# EAGLE board stepper cape (EAGLE 6.2)
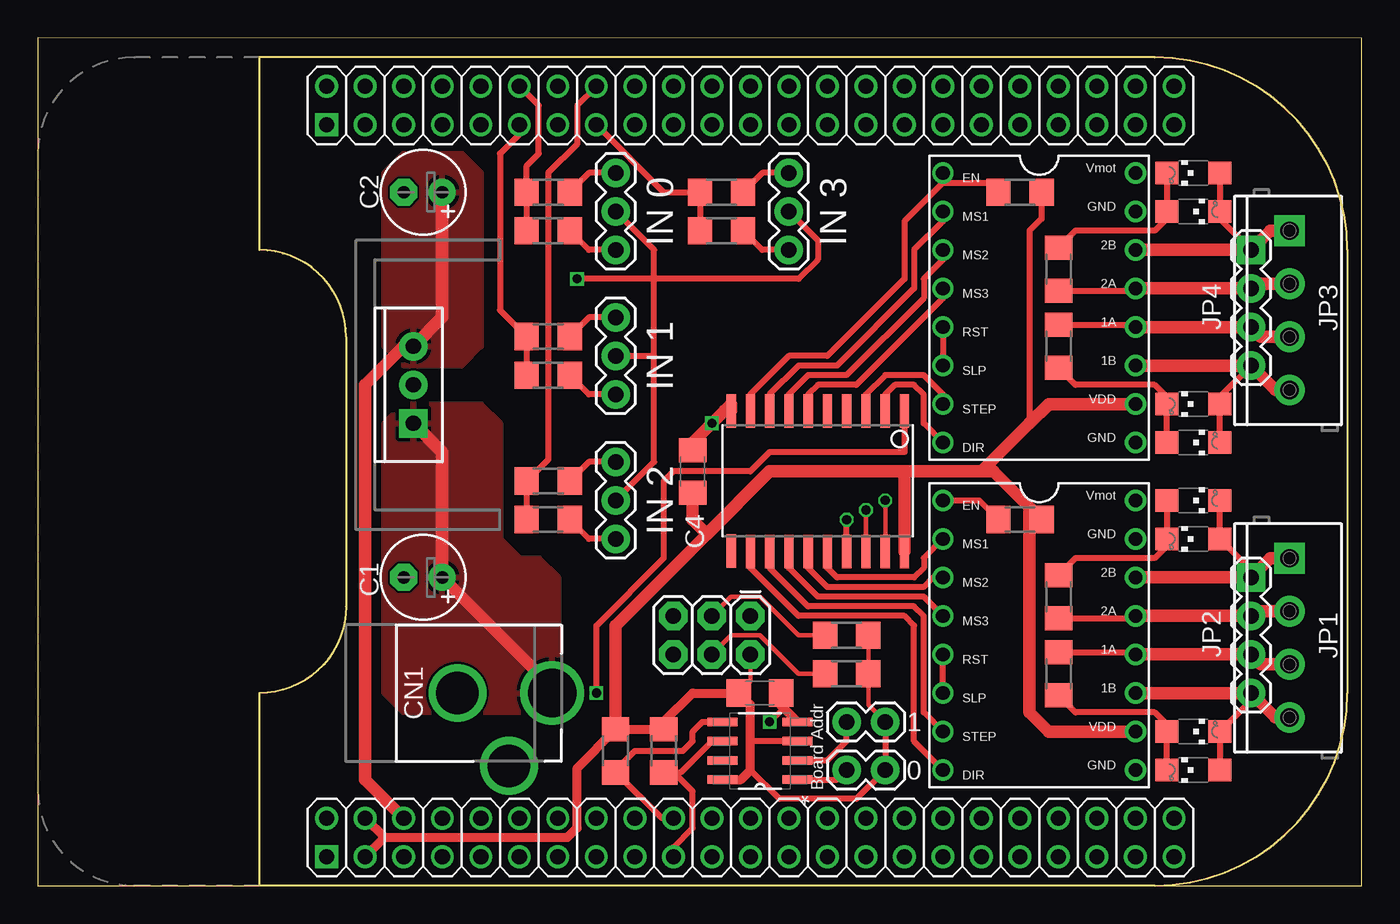
[diagram p0: board, top side]
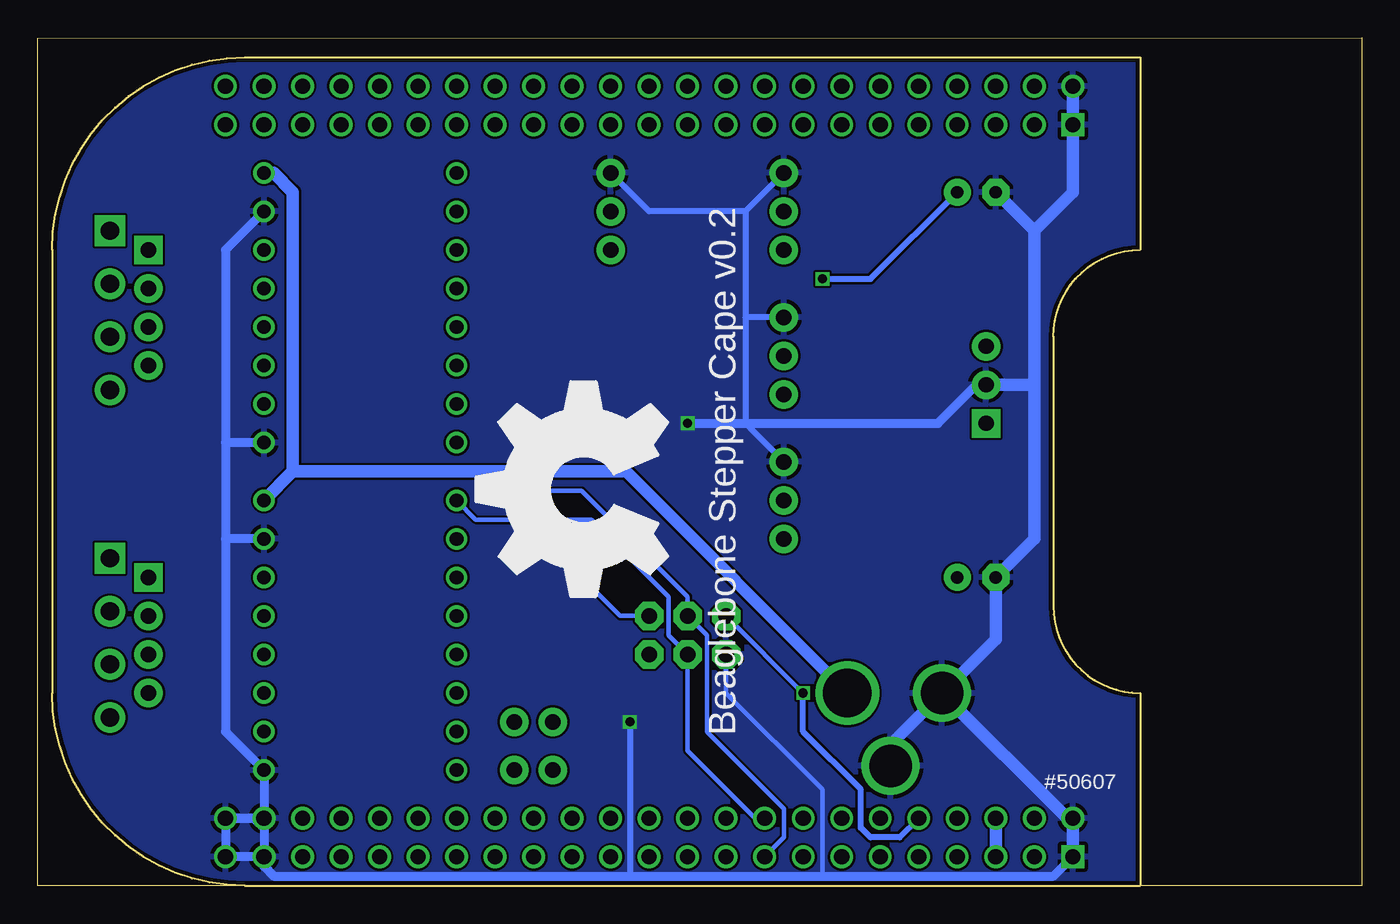
[diagram p1: board, bottom side, seen from below]

Size 87.3 x 55.89 mm. Coordinates in mm from the lower left corner, seen from the top.
Outline: 0,0 87.3,0 87.3,55.87 0,55.89 0,0
Copper layers (1*16): Top 0.035mm / dielectric 1.5mm / Bottom 0.035mm
Design rules: minimum track width 6mil, minimum drill 12mil, track to track 6mil, track to pad 6mil, pad to pad 6mil, via to via 6mil, smd to smd 0mil, copper to edge 10mil, drill to drill 10mil, minimum pad ring 10mil, minimum via ring 6mil, stop-mask expansion 2mil, vias tented up to drill 100mil, thermal gap 10mil

## Footprints (pad centres in the part's own frame; a part is rotated, then mirrored left to right if it is on the bottom)
E2,5-6 = drill 0.813 pad 1.778: + -1.27,0 | drill 0.813 pad 1.778 octagon: - 1.27,0
C1206 = smd 1.6 x 1.8: 1 -1.4,0; 2 1.4,0
DCJACK_2MM_PTH = drill 2.8: GND 0,7.35; GNDBREAK 4.8,10.75 | drill 3.2: PWR 0,13.6
2X3 = drill 1.016 pad 1.88 octagon: 1 0,0; 2 0,2.54; 3 2.54,0; 4 2.54,2.54; 5 5.08,0; 6 5.08,2.54
SCREWTERMINAL-3.5MM-4 = drill 1.2 pad 2.032 square: 1 0,0 | drill 1.2 pad 2.032: 2 3.5,0; 3 7,0; 4 10.5,0
1X04 = drill 1.016 pad 1.88 square: 1 0,0 | drill 1.016 pad 1.88: 2 2.54,0; 3 5.08,0; 4 7.62,0
1X03 = drill 1.016 pad 1.88: 1 0,0; 2 2.54,0; 3 5.08,0
1X02 = drill 1.016 pad 1.88: 1 0,0; 2 2.54,0
CHIPLED_1206 = smd 1.5 x 1.5: A 0,-1.75; C 0,1.75
R1206 = smd 1.6 x 1.803: 1 -1.422,0; 2 1.422,0
SOIC127P600X175-8N = smd 1.981 x 0.559: 1 -2.464,1.905; 2 -2.464,0.635; 3 -2.464,-0.635; 4 -2.464,-1.905; 5 2.464,-1.905; 6 2.464,-0.635; 7 2.464,0.635; 8 2.464,1.905
TO220-IGO = drill 1 pad 1.88: GND 0,0; OUT 2.54,0 | drill 1 pad 1.88 square: IN -2.54,0
BEAGLEBONE_SHIELD = drill 1 square: 1 4.445,19.05; 47 52.705,19.05 | drill 1: 2 1.905,19.05; 3 4.445,21.59; 4 1.905,21.59; 5 4.445,24.13; 6 1.905,24.13; 7 4.445,26.67; 8 1.905,26.67; 9 4.445,29.21; 10 1.905,29.21; 11 4.445,31.75; 12 1.905,31.75; 13 4.445,34.29; 14 1.905,34.29; 15 4.445,36.83; 16 1.905,36.83; 17 4.445,39.37; 18 1.905,39.37; 19 4.445,41.91; 20 1.905,41.91; 21 4.445,44.45; 22 1.905,44.45; 23 4.445,46.99; 24 1.905,46.99; 25 4.445,49.53; 26 1.905,49.53; 27 4.445,52.07; 28 1.905,52.07; 29 4.445,54.61; 30 1.905,54.61; 31 4.445,57.15; 32 1.905,57.15; 33 4.445,59.69; 34 1.905,59.69; 35 4.445,62.23; 36 1.905,62.23; 37 4.445,64.77; 38 1.905,64.77; 39 4.445,67.31; 40 1.905,67.31; 41 4.445,69.85; 42 1.905,69.85; 43 4.445,72.39; 44 1.905,72.39; 45 4.445,74.93; 46 1.905,74.93; 48 50.165,19.05; 49 52.705,21.59; 50 50.165,21.59; 51 52.705,24.13; 52 50.165,24.13; 53 52.705,26.67; 54 50.165,26.67; 55 52.705,29.21; 56 50.165,29.21; 57 52.705,31.75; 58 50.165,31.75; 59 52.705,34.29; 60 50.165,34.29; 61 52.705,36.83; 62 50.165,36.83; 63 52.705,39.37; 64 50.165,39.37; 65 52.705,41.91; 66 50.165,41.91; 67 52.705,44.45; 68 50.165,44.45; 69 52.705,46.99; 70 50.165,46.99; 71 52.705,49.53; 72 50.165,49.53; 73 52.705,52.07; 74 50.165,52.07; 75 52.705,54.61; 76 50.165,54.61; 77 52.705,57.15; 78 50.165,57.15; 79 52.705,59.69; 80 50.165,59.69; 81 52.705,62.23; 82 50.165,62.23; 83 52.705,64.77; 84 50.165,64.77; 85 52.705,67.31; 86 50.165,67.31; 87 52.705,69.85; 88 50.165,69.85; 89 52.705,72.39; 90 50.165,72.39; 91 52.705,74.93; 92 50.165,74.93
SO20L$ = smd 0.61 x 2.21: 1 -5.715,-4.636; 2 -4.445,-4.636; 3 -3.175,-4.636; 4 -1.905,-4.636; 5 -0.635,-4.636; 6 0.635,-4.636; 7 1.905,-4.636; 8 3.175,-4.636; 9 4.445,-4.636; 10 5.715,-4.636; 11 5.715,4.61; 12 4.445,4.636; 13 3.175,4.636; 14 1.905,4.636; 15 0.635,4.636; 16 -0.635,4.636; 17 -1.905,4.636; 18 -3.175,4.636; 19 -4.445,4.636; 20 -5.715,4.636
A4988BREAKOUT = drill 0.9: 1A 8.89,1.27; 1B 11.43,1.27; 2A 6.35,1.27; 2B 3.81,1.27; DIR 16.51,-11.43; EN -1.27,-11.43; GND 16.51,1.27; GND@0 1.27,1.27; MS1 1.27,-11.43; MS2 3.81,-11.43; MS3 6.35,-11.43; RST 8.89,-11.43; SLP 11.43,-11.43; STEP 13.97,-11.43; VDD 13.97,1.27; VMOT -1.27,1.27

## Placement (x,y rotation side)
C1  100u  [E2,5-6]  25.4,20.32 180 top
C2  100u  [E2,5-6]  25.4,45.72 180 top
C3  0.1u  [C1206]  47.62,12.7 0 top
C4  0.1u  [C1206]  43.18,27.3 90 top
CN1  [DCJACK_2MM_PTH]  20.32,12.7 270 top
J1  ISP  [2X3]  46.99,17.78 180 top
JP1  [SCREWTERMINAL-3.5MM-4]  82.55,21.59 270 top
JP2  [1X04]  80.01,20.32 270 top
JP3  [SCREWTERMINAL-3.5MM-4]  82.55,43.18 270 top
JP4  [1X04]  80.01,41.91 270 top
JP5  [1X03]  38.1,37.47 270 top
JP6  [1X03]  38.1,46.99 270 top
JP7  [1X03]  38.1,27.94 270 top
JP8  [1X03]  49.53,46.99 270 top
JP9  [1X02]  53.34,7.62 0 top
JP10  [1X02]  53.34,10.79 0 top
LED1  [CHIPLED_1206]  76.2,25.4 270 top
LED2  [CHIPLED_1206]  76.2,22.86 90 top
LED3  [CHIPLED_1206]  76.2,7.62 90 top
LED4  [CHIPLED_1206]  76.2,10.16 270 top
LED5  [CHIPLED_1206]  76.2,44.45 270 top
LED6  [CHIPLED_1206]  76.2,46.99 90 top
LED7  [CHIPLED_1206]  76.2,31.75 90 top
LED8  [CHIPLED_1206]  76.2,29.21 270 top
R1  5k6  [R1206]  53.34,13.97 0 top
R2  5k6  [R1206]  41.27,8.89 90 top
R3  5k6  [R1206]  38.1,8.89 90 top
R4  1k  [R1206]  67.31,40.64 270 top
R5  1k  [R1206]  67.31,35.56 90 top
R6  4k7  [R1206]  64.77,24.13 0 top
R7  1k  [R1206]  67.31,19.05 270 top
R8  1k  [R1206]  67.31,13.97 90 top
R9  4k7  [R1206]  64.77,45.72 0 top
R10  10k  [R1206]  33.66,33.66 0 top
R11  20k  [R1206]  33.66,36.2 180 top
R12  10k  [R1206]  33.66,43.18 0 top
R13  20k  [R1206]  33.66,45.72 180 top
R14  10k  [R1206]  33.66,24.13 0 top
R15  20k  [R1206]  33.66,26.67 180 top
R16  10k  [R1206]  45.09,43.18 0 top
R17  20k  [R1206]  45.09,45.72 180 top
R18  5k6  [R1206]  53.34,16.51 0 top
U1  CAT24C  [SOIC127P600X175-8N]  47.62,8.89 180 top
U2  LM7805  [TO220-IGO]  24.77,33.02 90 top
U$1  BEAGLEBONE_OUTLINE  [BEAGLEBONE_SHIELD]  0,54.61 270 top
U$2  ATTINY2313  [SO20L$]  51.44,26.67 180 top
U$3  [OSHW_FILLX500_NOTEXT]  45.72,19.05 90 bottom
X  A4988BREAKOUT  [A4988BREAKOUT]  71.12,24.13 270 top
X1  A4988BREAKOUT  [A4988BREAKOUT]  71.12,45.72 270 top

## Library data of the parts
C1-C4 CN1 LED1-LED8 R1-R18 U$1 = adafruit
J1 JP1-JP10 = SparkFun-Connectors
U1 = CAT24C256W; MPN: CAT24C256WI-GT3; OC_FARNELL: 1718127; OC_NEWARK: 08R5412; PACKAGE: SOIC-8; SUPPLIER: CATALYST SEMICONDUCTOR
U2 = SparkFun-PowerIC
U$2 = avr-7
U$3 = ohw-logo
X X1 = RepRapjr

## Nets
+3V3: C3.1 C4.1 J1.2 JP9.2 JP10.2 R1.2 R2.2 R3.2 R6.2 R9.2 R18.2 U1.3 U1.8 U$1.49 U$1.50 U$2.20 X1.VDD X.VDD
+5V: C2.+ JP5.2 JP6.2 JP7.2 JP8.2 U2.OUT U$1.51 U$1.52
AIN0: U$1.85
AIN3: U$1.84
GND: C1.- C2.- C3.2 C4.2 CN1.GND CN1.GNDBREAK J1.6 JP5.1 JP6.1 JP7.1 JP8.1 R11.1 R13.1 R15.1 R17.1 U1.4 U2.GND U$1.1 U$1.2 U$1.47 U$1.48 U$1.89 U$1.90 U$1.91 U$1.92 U$2.10 X1.GND X1.GND@0 X.GND X.GND@0
GPIO1_6: U$1.3
GPIO1_7: U$1.4
GPIO2_6: U$1.45
GPIO2_7: U$1.46
GPIO2_8: U$1.43
GPIO2_9: U$1.44
GPIO2_11: U$1.42
I2C1_SCL: J1.3 R18.1 U$1.63 U$2.19
I2C1_SDA: J1.4 R1.1 U$1.64 U$2.17
I2C2_SCL: R2.1 U1.6 U$1.65
I2C2_SDA: R3.1 U1.5 U$1.66
IN_0: R12.1 R13.2 U$1.12
IN_1: R10.1 R11.2 U$1.11
IN_2: R14.1 R15.2 U$1.16
IN_3: R16.1 R17.2 U$1.15
MISO: J1.1 R6.1 U$2.18 X.EN
N$1: JP9.1 U1.1
N$2: U$2.2 X1.DIR
N$3: JP10.1 U1.2
N$4: U$2.3 X1.STEP
N$5: JP1.1 JP2.1 LED1.C LED2.A X.2B
N$6: U$2.6 X1.MS3
N$7: U$2.7 X1.MS2
N$8: U$2.8 X1.MS1
N$9: X1.RST X1.SLP
N$10: JP3.1 JP4.1 LED5.C LED6.A X1.2B
N$11: JP3.2 JP4.2 R4.2 X1.2A
N$12: X.RST X.SLP
N$13: JP1.2 JP2.2 R7.2 X.2A
N$14: JP1.3 JP2.3 R8.2 X.1A
N$15: JP1.4 JP2.4 LED3.A LED4.C X.1B
N$16: LED1.A LED2.C R7.1
N$17: JP3.3 JP4.3 R5.2 X1.1A
N$18: LED3.C LED4.A R8.1
N$19: JP3.4 JP4.4 LED7.A LED8.C X1.1B
N$20: LED5.A LED6.C R4.1
N$21: LED7.C LED8.A R5.1
N$22: R9.1 U$2.9 X1.EN
N$23: U$2.12 X.DIR
N$24: U$2.13 X.STEP
N$25: JP6.3 R12.2
N$26: JP5.3 R10.2
N$27: JP7.3 R14.2
N$28: JP8.3 R16.2
N$29: U$2.14 X.MS3
N$30: U$2.15 X.MS2
N$31: U$2.16 X.MS1
RESET: J1.5 U$1.56 U$2.1
V+: C1.+ CN1.PWR U2.IN X1.VMOT X.VMOT

## Tracks (layer width: path | path; a pad name or v marks a point on that pad's centre or on a via)
+3V3
  Top 0.305: J1.2 46.99,13.46 C3.1 | R18.2 R1.2 54.76,11.91 JP10.2
  Top 0.406: U1.3 46.99,9.53 | JP10.2 JP9.2 53.98,5.71 48.9,5.71 46.99,7.62 | R9.2 66.19,43.97 65.41,43.18 65.41,30.48
  Top 0.61: U$1.49 22.86,3.17 | 22.86,3.17 34.92,3.17 35.56,3.81 35.56,7.75 R3.2 R2.2 41.27,10.79 43.18,12.7 C3.1 46.99,11.94 46.99,9.53 46.99,7.62 46.35,6.99 U1.8 | U$1.50 22.86,3.17
  Top 0.813: R3.2 38.1,17.14 44.13,23.18 | 62.23,27.3 65.41,30.48 66.67,31.75 X1.VDD | 62.23,27.3 57.15,27.3 | 57.15,27.3 48.26,27.3 44.13,23.18 | 62.23,27.3 63.02,27.3 65.48,24.84 | 65.48,24.84 R6.2 | X.VDD 66.67,10.16 65.41,11.43 65.41,24.77 65.48,24.84 | 57.15,27.3 U$2.20 | C4.1 43.18,24.13 44.13,23.18
+5V  (via drill 0.6)
  Top 0.406: JP8.2 51.44,42.55 51.44,41.27 50.16,40.01 40.64,40.01 | JP7.2 40.64,27.94 40.64,34.92 | 40.64,34.92 40.64,40.01 | 40.64,40.01 40.64,41.91 JP6.2 | 40.64,40.01 v35.56,40.01 | JP5.2 40.64,34.92
  Top 0.813: C2.+ 26.67,37.47 U2.OUT 24.13,35.56 21.59,33.02 21.59,6.99 U$1.52
  Bottom 0.406: v35.56,40.01 32.38,40.01 C2.+
  Bottom 0.813: U$1.52 U$1.51
  pour Top: 24.13,34.29 22.86,35.56 22.86,46.99 24.13,48.26 27.94,48.26 29.21,46.99 29.21,35.56 27.94,34.29
GND  (via drill 0.6)
  Top 0.406: JP8.1 47.78,46.99 R17.1 | JP6.1 36.35,46.99 R13.1 | JP5.1 36.35,37.47 R11.1 | JP7.1 36.35,27.94 R15.1 | 49.02,11.86 49.02,11.56 v48.26,10.79
  Top 0.61: C3.2 49.02,11.86 U1.4
  Top 0.813: C4.2 43.18,29.21 v44.45,30.48 | 45.28,31.3 v44.45,30.48 | v44.45,30.48 45.72,31.75 U$2.10
  Bottom 0.305: J1.6 41.91,12.7 35.56,6.35 35.56,0.64
  Bottom 0.406: JP7.1 40.64,30.48 40.64,37.47 | JP6.1 40.64,44.45 | 40.64,44.45 40.64,37.47 | 40.64,44.45 46.99,44.45 JP8.1 | JP5.1 40.64,37.47 | v48.26,10.79 48.26,0.64
  Bottom 0.61: U$1.92 U$1.91 U$1.89 | 72.39,3.81 U$1.89 | U$1.90 U$1.92 | U$1.92 73.03,4.45 72.39,3.81 | 74.93,22.86 74.93,10.16 X.GND U$1.90 | X.GND@0 74.93,22.86 | X1.GND@0 74.93,41.91 74.93,29.21 | 74.93,29.21 74.93,22.86 | X1.GND 74.93,29.21 | U$1.90 72.39,3.81 | U$1.89 72.39,1.27 71.75,0.64 48.26,0.64 35.56,0.64 20.32,0.64 U$1.47 | v44.45,30.48 40.64,30.48 27.94,30.48 25.4,33.02 U2.GND
  Bottom 0.813: CN1.GNDBREAK 31.07,9.3 CN1.GND | CN1.GND 24.13,16.24 C1.- 21.59,22.86 21.59,33.02 | 21.59,33.02 U2.GND | C2.- 21.59,43.18 | 21.59,43.18 21.59,33.02 | U$1.47 U$1.48 19.41,4.45 CN1.GND | U$1.2 U$1.1 19.05,45.72 21.59,43.18
  pour Bottom: 14.61,0 14.61,12.7 arc90 20.32,18.41 20.32,19.05 20.32,36.83 arc90 15.24,41.91 14.61,41.91 14.61,54.61 73.66,54.61 arc-90 86.36,41.91 86.36,12.06 arc-90 74.3,0 73.66,0
I2C1_SCL  (via drill 0.6)
  Top 0.305: R18.1 50.16,16.51 47.62,19.05 45.72,19.05 J1.3 | U$2.19 v55.88,25.4
  Bottom 0.305: U$1.63 38.1,3.17 38.1,5.08 43.18,10.16 43.18,16.51 J1.3 44.45,19.05 51.44,26.04 55.24,26.04 v55.88,25.4
I2C1_SDA  (via drill 0.6)
  Top 0.305: J1.4 45.72,16.51 47.62,16.51 50.16,13.97 R1.1
  Top 0.406: U$2.17 v53.34,24.13
  Bottom 0.305: U$1.64 40.01,4.45 44.45,8.89 J1.4 45.72,16.51 45.72,19.05 50.8,24.13 v53.34,24.13
I2C2_SCL
  Top 0.406: R2.1 41.91,7.49 | 41.91,7.49 42.41,7.49 44.45,9.53 U1.6 | U$1.65 41.91,2.54 43.18,3.81 43.18,6.22 41.91,7.49
I2C2_SDA
  Top 0.406: U1.5 43.81,10.79 43.18,10.16 43.18,9.53 42.55,8.89 39.37,8.89 38.1,7.62 R3.1 41.15,4.45 U$1.66
IN_0
  Top 0.406: R12.1 R13.2 32.23,47.47 33.02,48.26 33.02,51.44 U$1.12
IN_1
  Top 0.406: R10.1 R11.2 30.48,37.95 30.48,48.26 31.75,49.53 U$1.11
IN_2
  Top 0.406: U$1.16 35.56,51.44 35.56,48.9 33.66,46.99 33.66,28.09 R15.2 R14.1
IN_3
  Top 0.406: U$1.15 41.27,45.72 R17.2 R16.1
MISO  (via drill 0.6)
  Top 0.305: U$2.18 v54.61,24.77
  Top 0.406: X.EN 62.08,25.4 R6.1
  Bottom 0.305: v54.61,24.77 54.61,24.13 | 54.61,24.13 54.61,23.5 48.9,17.78 J1.1 | X.EN 58.42,24.13 54.61,24.13
N$1
  Top 0.406: U1.1 52.7,6.99 JP9.1
N$2
  Top 0.406: X1.DIR 58.42,30.48 58.42,32.38 57.78,33.02 56.52,33.02 55.88,32.38 U$2.2
N$3
  Top 0.406: U1.2 52.07,8.26 53.34,9.53 JP10.1
N$4
  Top 0.406: X1.STEP 59.69,32.38 58.42,33.66 55.88,33.66 54.61,32.38 U$2.3
N$5
  Top 0.406: JP2.1 80.01,20.8 LED2.A LED1.C
  Top 0.813: JP1.1 81.28,21.59 JP2.1 X.2B
N$6
  Top 0.406: X1.MS3 59.69,38.73 53.98,33.02 51.44,33.02 50.8,32.38 U$2.6
N$7
  Top 0.406: X1.MS2 59.69,41.27 58.42,40.01 58.42,38.73 53.34,33.66 50.8,33.66 49.53,32.38 U$2.7
N$8
  Top 0.406: X1.MS1 59.69,43.81 57.78,41.91 57.78,39.37 52.7,34.29 50.16,34.29 48.26,32.38 U$2.8
N$9
  Top 0.406: X1.RST X1.SLP
N$10
  Top 0.406: LED6.A LED5.C 77.95,43.97 JP4.1
  Top 0.813: JP3.1 81.28,43.18 JP4.1 X1.2B
N$11
  Top 0.406: R4.2 72.24,39.22 X1.2A
  Top 0.813: JP3.2 80.32,39.68 JP4.2 X1.2A
N$12
  Top 0.406: X.SLP X.RST
N$13
  Top 0.406: R7.2 72.24,17.63 X.2A
  Top 0.813: JP1.2 80.32,18.09 JP2.2 X.2A
N$14
  Top 0.406: R8.2 72.24,15.39 X.1A
  Top 0.813: JP1.3 80.66,14.59 JP2.3 X.1A
N$15
  Top 0.406: JP2.4 80.01,12.22 LED4.C LED3.A
  Top 0.813: JP1.4 81.62,11.09 JP2.4 X.1B
N$16
  Top 0.406: LED1.A LED2.C 74.45,22.38 73.66,21.59 68.43,21.59 R7.1
N$17
  Top 0.406: R5.2 72.24,36.98 X1.1A
  Top 0.813: JP3.3 80.66,36.18 JP4.3 X1.1A
N$18
  Top 0.406: LED3.C LED4.A 74.45,10.64 73.66,11.43 68.43,11.43 R8.1
N$19
  Top 0.406: LED8.C LED7.A 77.95,32.23 JP4.4
  Top 0.813: JP3.4 81.62,32.68 JP4.4 X1.1B
N$20
  Top 0.406: LED6.C LED5.A 74.45,43.97 73.66,43.18 68.43,43.18 R4.1
N$21
  Top 0.406: LED8.A LED7.C 74.45,32.23 73.66,33.02 68.43,33.02 R5.1
N$22
  Top 0.406: X1.EN 59.69,46.35 | 59.69,46.35 57.15,43.81 57.15,40.01 52.07,34.92 49.53,34.92 46.99,32.38 U$2.9 | 59.69,46.35 62.71,46.35 R9.1
N$23
  Top 0.406: X.DIR 57.78,9.53 57.78,17.14 57.15,17.78 50.16,17.78 46.99,20.95 U$2.12
N$24
  Top 0.406: X.STEP 58.42,11.43 58.42,17.78 57.78,18.41 50.8,18.41 48.26,20.95 U$2.13
N$25
  Top 0.406: JP6.3 36.35,41.91 R12.2
N$26
  Top 0.406: JP5.3 36.35,32.38 R10.2
N$27
  Top 0.406: JP7.3 36.35,22.86 R14.2
N$28
  Top 0.406: JP8.3 47.78,41.91 R16.2
N$29
  Top 0.406: X.MS3 58.42,19.05 51.44,19.05 49.53,20.95 U$2.14
N$30
  Top 0.406: X.MS2 59.05,20.32 58.42,19.68 52.07,19.68 50.8,20.95 U$2.15
N$31
  Top 0.406: X.MS1 58.42,21.59 58.42,20.95 57.78,20.32 52.7,20.32 52.07,20.95 U$2.16
RESET  (via drill 0.6)
  Top 0.406: U$2.1 57.15,28.57 48.26,28.57 46.99,27.3 41.91,27.3 41.27,26.67 41.27,21.59 36.83,17.14 v36.83,12.7
  Bottom 0.305: J1.5 v36.83,12.7
  Bottom 0.406: U$1.56 30.48,3.17 32.38,3.17 33.02,3.81 33.02,6.35 36.83,10.16 v36.83,12.7
V+
  Top 0.813: CN1.PWR 33.92,13.07 C1.+ 26.67,28.57 U2.IN
  Bottom 0.813: X.VMOT 70.48,27.3 | 70.48,27.3 48.52,27.3 CN1.PWR | X1.VMOT 71.75,46.99 70.48,45.72 70.48,27.3
  pour Top: 34.29,11.43 24.13,11.43 22.86,12.7 22.86,30.48 24.13,31.75 29.21,31.75 30.48,30.48 30.48,22.86 31.75,21.59 33.02,21.59 34.29,20.32

## Text on the board
tNames: IN 0 | IN 3 | IN 1 | IN 2 | 1 | Board Addr | 0
bNames: Beaglebone Stepper Cape v0.2 | #50607